# Altium PCB Multivibrator.PcbDoc
Units mm, origin at the board's own origin, x right, y up, seen from the top; angles counter-clockwise.
Board outline 75 x 75 mm, 2 copper layers (Top Layer, Bottom Layer); 9 components, 6 nets, 24 pads, 2 vias.
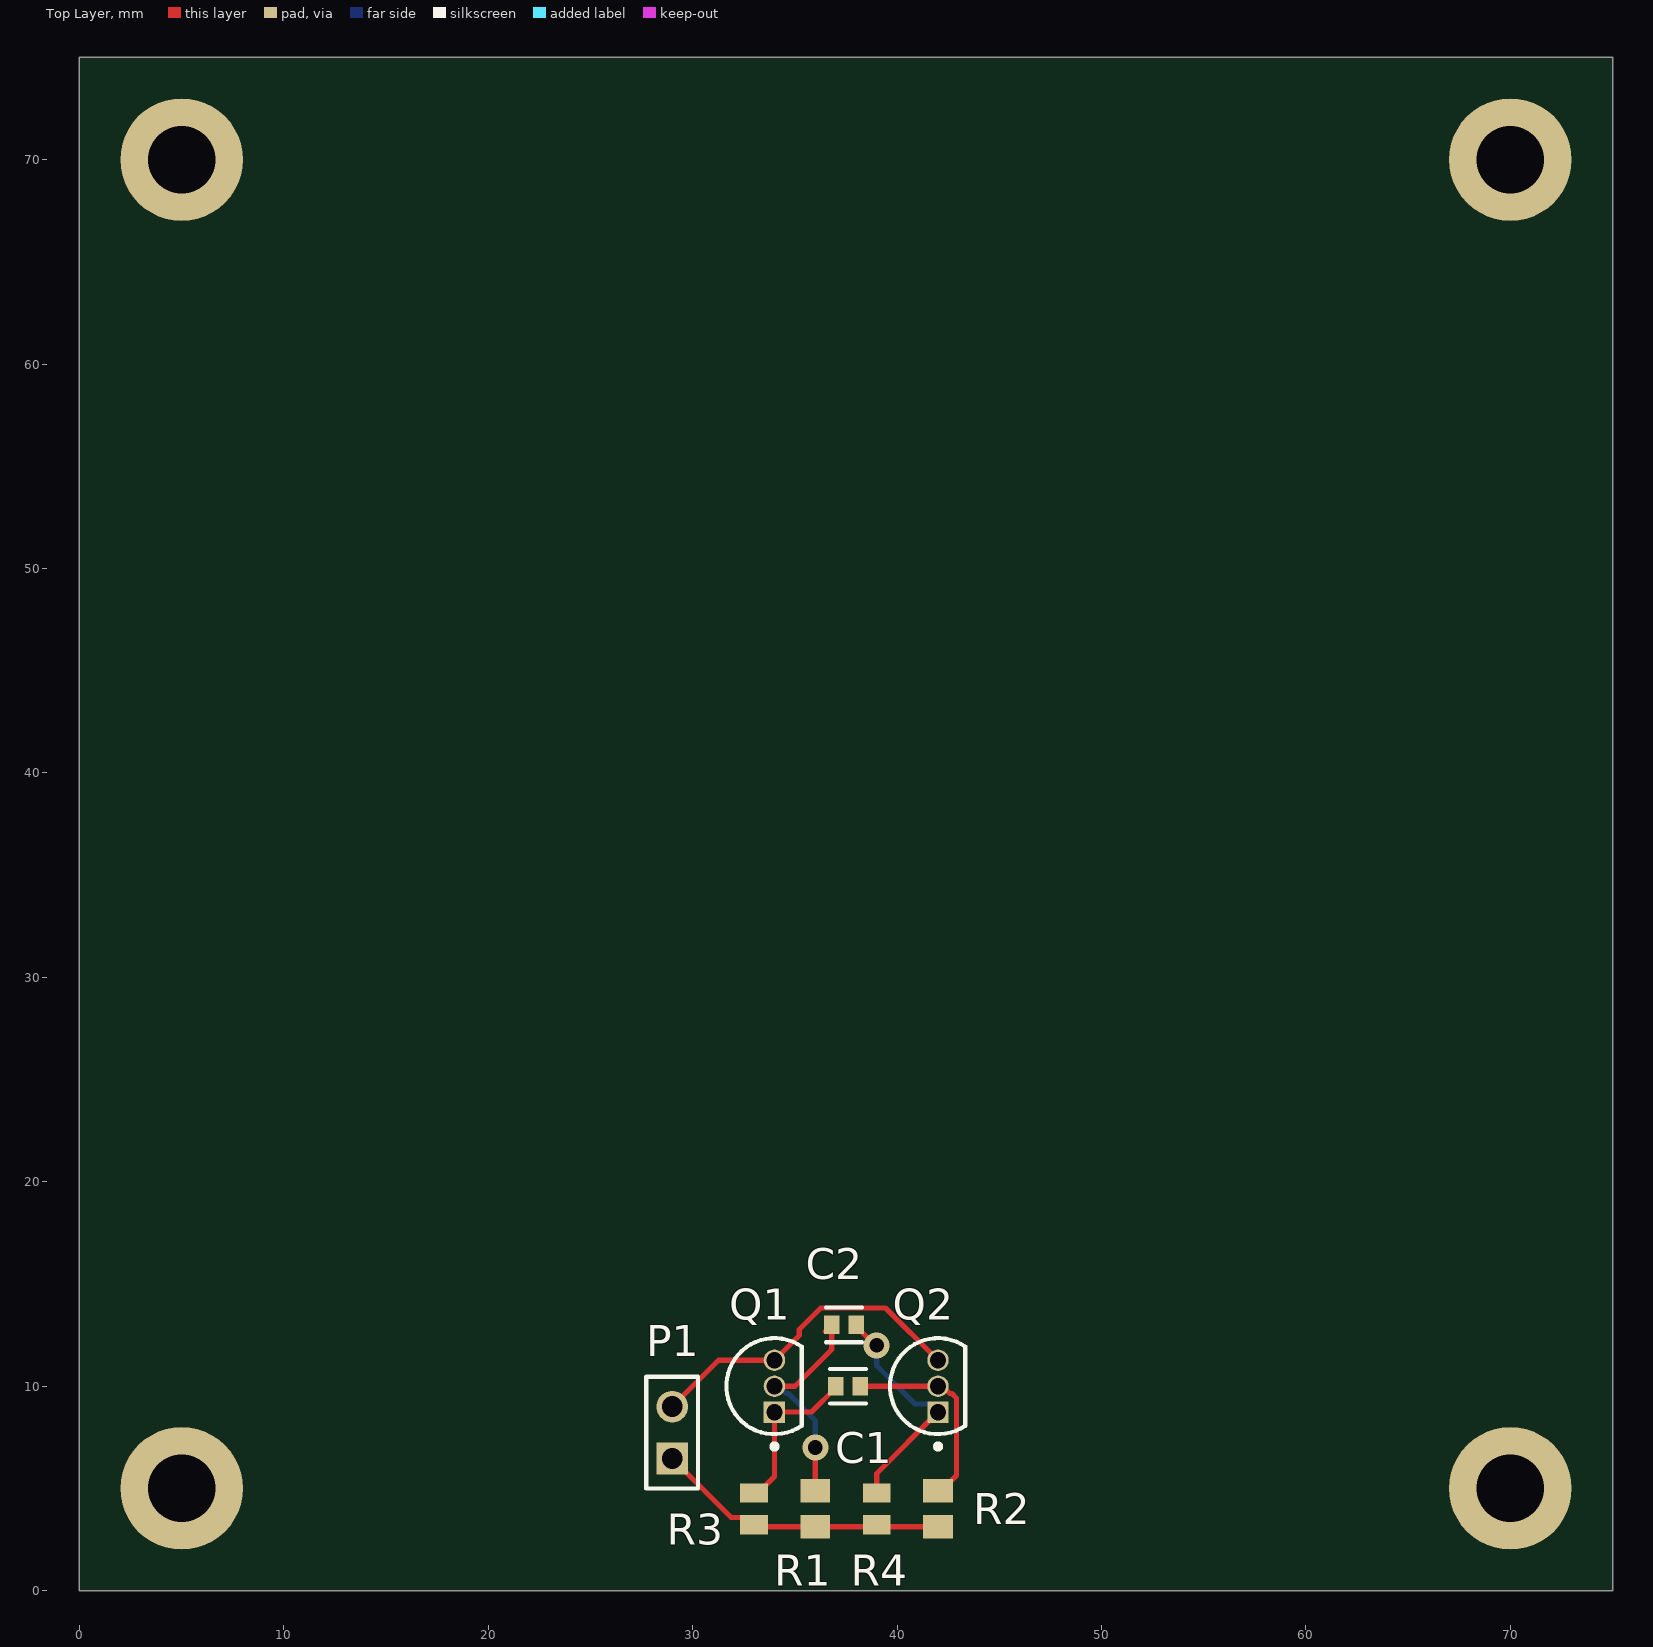
[diagram p0: Top Layer view]
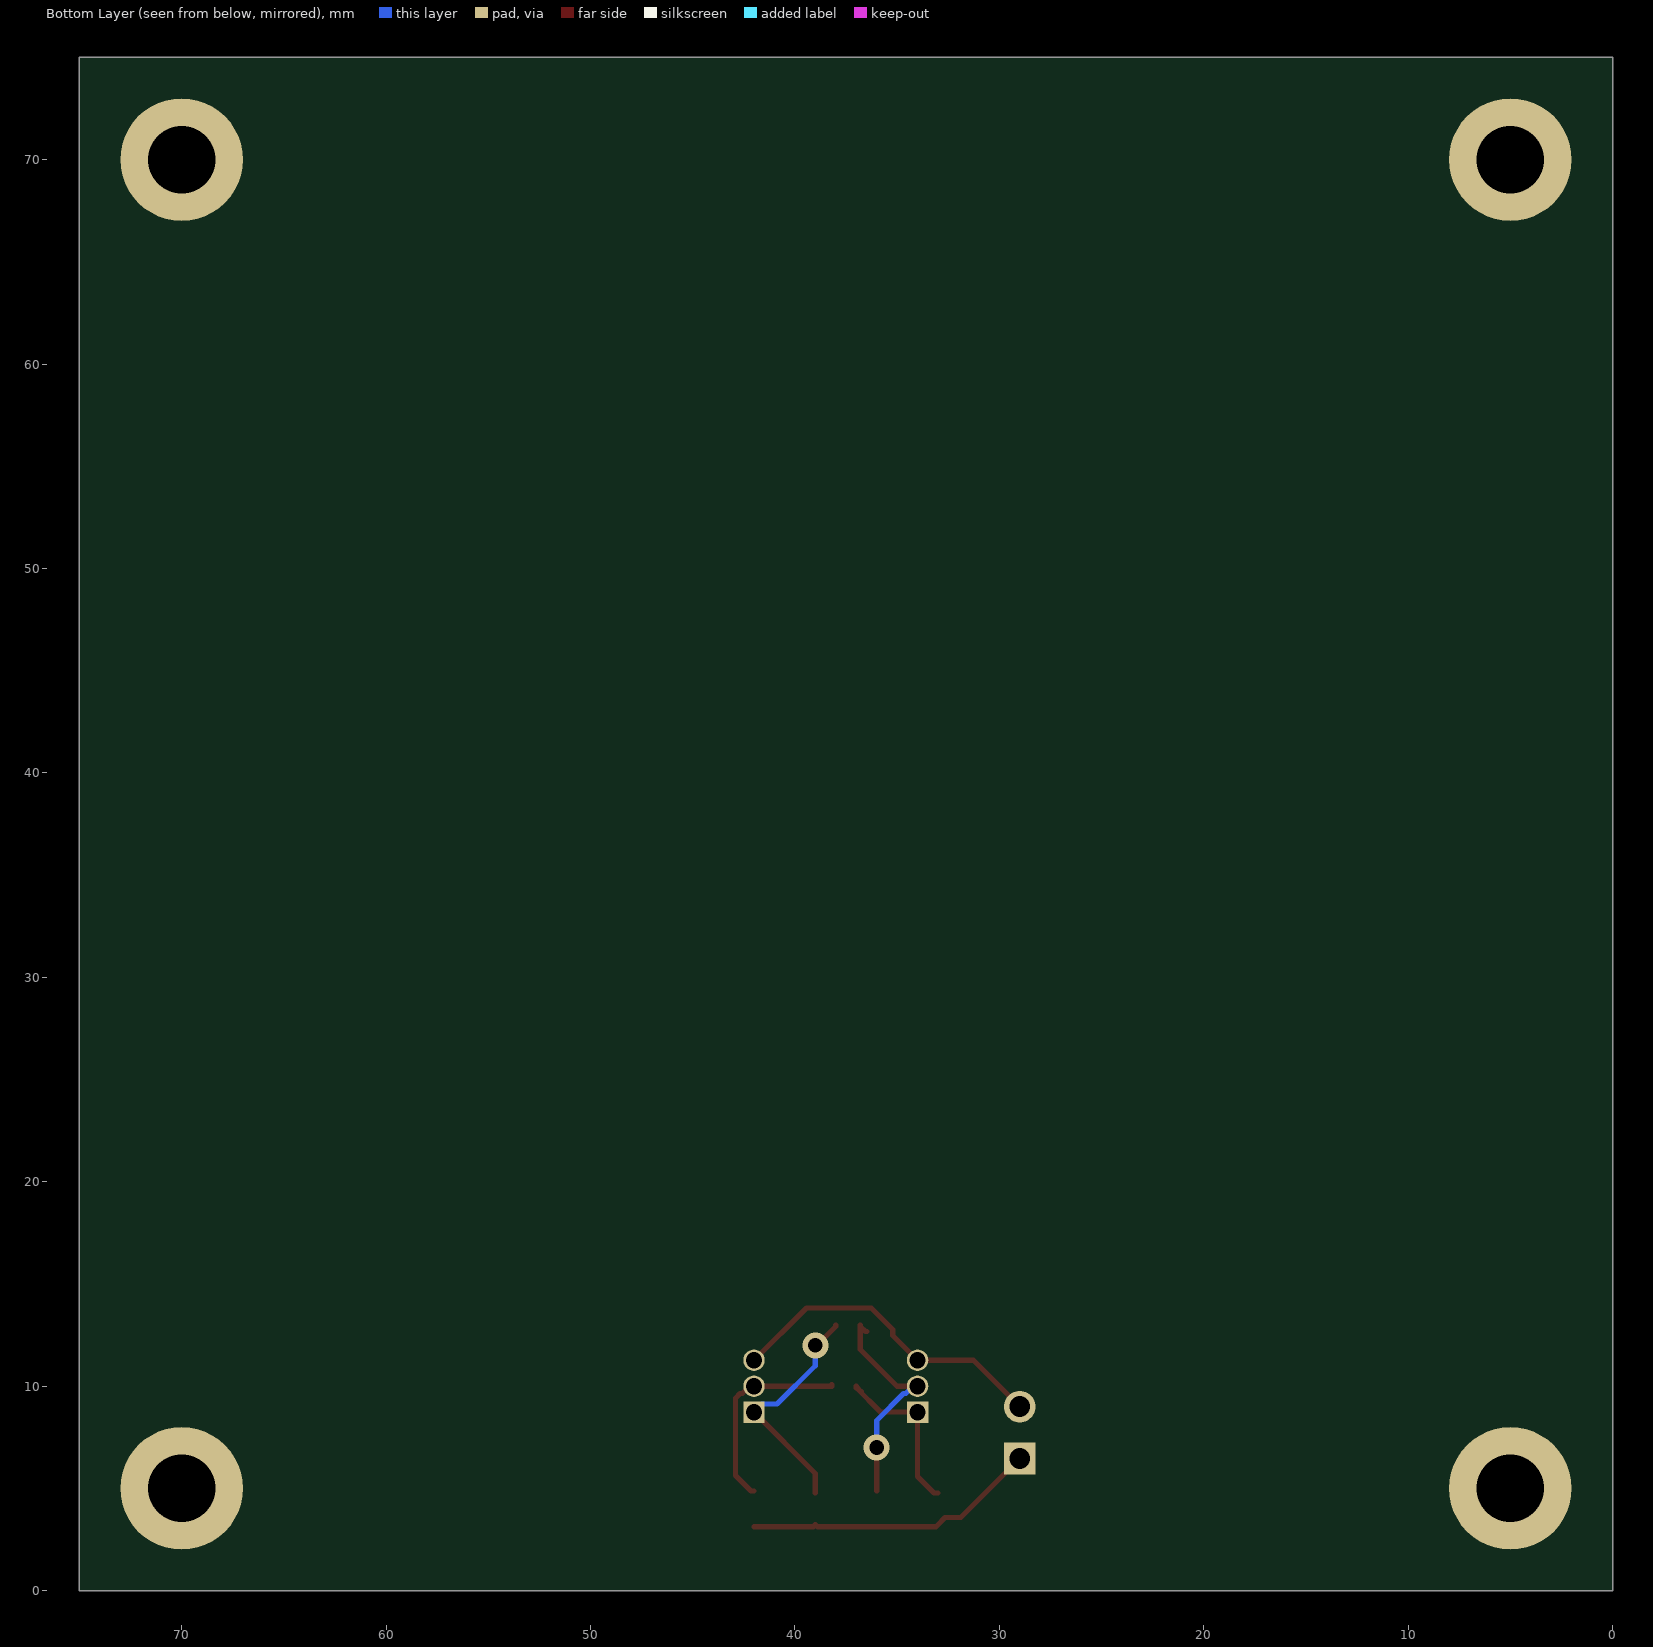
[diagram p1: Bottom Layer view, seen from below]

## Layer stack, top to bottom
Top Solder: solder mask 0.0102, Solder Resist, Dk 3.5
Top Layer: signal copper 0.0356
Dielectric 1: dielectric 0.32, FR-4, Dk 4.8
Bottom Layer: signal copper 0.0356
Bottom Solder: solder mask 0.0102, Solder Resist, Dk 3.5

## Board outline
0,0 0,75 75,75 75,0

## Design rules (kind name [scope] priority, off if disabled: settings)
Clearance [All] p1: gap=0.254 ignorepadtopadclearanceinfootprint=FALSE except(0.22: THPad-THPad)
HoleSize [All] p1: absolutevalues=TRUE maxlimit=3.3 minlimit=0.025 maxpercent=80.000 minpercent=20.000
MinimumSolderMaskSliver [All] p1: minsoldermaskwidth=0.22
PolygonConnect [All] p1: connectstyle=Relief reliefconductorwidth=0.254 reliefentries=4 polygonreliefangle="90 Angle" airgapwidth=0.254
RoutingVias [All] p1: holewidth=0.711 width=1.27 viastyle="Through Hole" minholewidth=0.71 minwidth=1.26 maxholewidth=0.712 maxwidth=1.28
SolderMaskExpansion SolderMaskExpansion_Transistor [HasFootprint('ONSC-TO-92-3-29-11')] p1: expansion=0 istentingtop=FALSE
SolderMaskExpansion [All] p2: expansion=0.102 istentingtop=FALSE
Width [All] p1: maxlimit=0.254 minlimit=0.254 preferedwidth=0.254
28 further rules are at their usual default settings.

## Components (designator, comment, footprint, x,y, rotation, side; value= is the part's Value field where it differs from the comment)
C1 "22nF" FP-C0603C-CF-MFG 37.6,10 r0 top value="22,000 pF"
C2 "22nF" FP-C0603C-CF-MFG 37.4,13 r0 top value="22,000 pF"
P1 "TSW-102-26-F-S" SMTC-TSW-102-26-XX-S 29,6.46 r90 top
Q1 "BC547CG" ONSC-TO-92-3-29-11 34,10 r90 top
Q2 "BC547CG" ONSC-TO-92-3-29-11 42,10 r90 top
R1 "100K" RESC2013X70X40NL20T20 36,4 r270 top
R2 "100K" RESC2013X70X40NL20T20 42,4 r270 top
R3 "1K" RESC2013X70X40LL20T20 33,4 r270 top
R4 "1K" RESC2013X70X40LL20T20 39,4 r270 top

## Footprints (in the part's own frame and the unit in brackets; to place one, negate y for a bottom-side part, rotate by r counter-clockwise, add the part's x,y. Pads: shape width x height; smd on the part's side, far side on the other; paste and mask are expansions set on the pad)
FP-C0603C-CF-MFG [mm]
  rect 0.75x0.9 smd paste+0 mask+0: 1(-0.6,0) 2(0.6,0)
  silkscreen extent -0.87,-0.85 0.88,0.85, body extent -1.2,-0.6 1.2,0.6, height 0.25
ONSC-TO-92-3-29-11 [mm] "TO, 3-Leads, Body Dia 4.7mm, Pitch 1.27mm"
  rect 1.05x1.05 hole 0.8: 1(-1.27,0)
  round 1.05 hole 0.8: 2(0,0) 3(1.27,0)
  silkscreen extent -3.07,-1.34 2.35,2.35, body extent -2.35,-1.33 2.36,2.36, height 7.87
RESC2013X70X40LL20T20 [mm] "Chip Resistor, 2-Leads, Body 2.00x1.25mm, IPC High Density"
  rect 0.95x1.35 smd: 1(-0.775,0) 2(0.775,0)
  body extent -1.1,-0.72 1.1,0.72, height 0.7
RESC2013X70X40NL20T20 [mm] "Chip Resistor, 2-Leads, Body 2.00x1.25mm, IPC Medium Density"
  rect 1.15x1.45 smd: 1(-0.875,0) 2(0.875,0)
  body extent -1.1,-0.72 1.1,0.72, height 0.7
SMTC-TSW-102-26-XX-S [mm] ".025 SQ Post Terminal Strip Assembly, 1x2 Pins, Vertical, 2.54mm Pitch, Male"
  rect 1.55x1.55 hole 1.02: 1(0,0)
  round 1.55 hole 1.02: 2(2.54,0)
  silkscreen extent -1.46,-1.27 4,1.27, body extent -1.4,-1.27 3.81,1.27, height 8.38

## Part data
C1 C2: library part CMP-2006-03745-2, "CAP CER 0.022UF 16V 5% X7R 0603", Capacitance="22,000 pF", Manufacturer=KEMET, Manufacturer Part Number=C0603C223J4RACTU, Package=C0603C-CF, Temperature="-55°C to +125°C", Temperature Characteristic=X7R, Temperature Coefficient=30ppm/°C, Temperature Range High=+125°C, Temperature Range Low=-55°C, Tolerance=0.05, Voltage Rating="16 V", Automotive=Yes, Automotive Grade="Grade 1", Category=Cap, ComponentLink2Description=Datasheet, ComponentLink2URL=https://api.kemet.com/component-edge/download/datasheet/C0603C100J5GACAUTO.pdf, Device Class L1="Passive Components", Device Class L2=Capacitors, Device Class L3="Ceramic Capacitors", Digikey Description="CAP CER 0.022UF 16V 5% X7R 0603", Height=0.87mm, Lead Free=Yes, Material=Ceramic, Mouser Description="Multilayer Ceramic Capacitors MLCC - SMD/SMT 16volts 22000pF X7R 5%", Octopart=https://octopart.com/c0603c223j4ractu-kemet-12542861, RoHS=TRUE
P1: library part CMP-1024-00329-1, "0.025\" SQ Post Header, Through-hole, Vertical, -55 to 125 degC, 2.54 mm Pitch, 2-Pin, Male, RoHS", Manufacturer=Samtec, Temperature Range="-55 to 125 degC", ComponentLink1Description="Manufacturer URL", ComponentLink1URL=http://www.samtec.com, ComponentLink2Description=Datasheet, ComponentLink2URL=http://www.samtec.com/documents/webfiles/pdf/TSW_TH.PDF, ComponentLink3Description="Package Specification", ComponentLink3URL=http://www.samtec.com/documents/webfiles/cpdf/TSW-XXX-XX-XXX-X-XX-XXX-MKT.pdf, DatasheetVersion=F-214, Mounting Technology=Through-hole, Orientation=Vertical, PackageDescription=".025[0.64] SQ. Post Terminal Strip Assembly", PackageReference=TSW-102-26-XX-S, PackageVersion="DM, 8/1988", PartNumber=TSW-102-26-F-S, Pitch="2.54 mm", RoHS=True
Q1 Q2: library part CMP-1048-01464-1, "Amplifier Transistor, NPN Silicon, 3-Pin TO-92, Pb-Free, Bulk Box", Manufacturer="On Semiconductor", ComponentLink1Description="Manufacturer URL", ComponentLink1URL=http://www.onsemi.com/, ComponentLink2Description=Datasheet, ComponentLink2URL=http://www.onsemi.com/pub_link/Collateral/BC546-D.PDF, ComponentLink3Description="Package Specification", ComponentLink3URL=http://www.onsemi.cn/pub_link/Collateral/2N6426-D.PDF, DatasheetVersion="Rev. 7", fT Min (MHz)=150, IC Continuous (A)=0.1, Mounting Technology="Through Hole", PackageDescription="3-Pin Transistor Outline, Body 4.825 x 3.685 mm, Pitch 1.27 mm", PackageReference=TO-92-3-29-11_AM_SL, PackageVersion="Rev. AM", Packing="Bulk Box", PartNumber=BC547CG, Polarity=NPN, RoHS=TRUE
R1 R2: library part CMP-2001-00338-1, Manufacturer=Panasonic, Part Number=ERJ-6GEYJ104V
R3 R4: library part CMP-2001-00477-1, Manufacturer=Panasonic, Part Number=ERJ-P06J102V

## Free pads (board coordinates)
  round 6 hole 3.3: 3(5,5) 3(5,70) 3(70,5) 3(70,70)

## Via types
v1: diameter 1.27, hole 0.711, Top Layer to Bottom Layer, tented both sides, 2 vias

## Nets (pads, with @x,y where several pads share a name; then routed paths per layer and width w, separated by ;. In a path a pad name is that pad's centre, name@x,y a point inside that pad or via, vN(x,y) a via of type N, cw(c..) or ccw(c..) an arc to the next point about the centre after c; other vN are vias at no path point)
12V: P1.1 R1.2 R2.2 R3.2 R4.2 | length 14.5
  Top Layer w0.254: P1.1 31.887,3.573 32.652,3.573 R3.2 33.1,3.125 R1.2 38.9,3.125 R4.2 39.1,3.125 R2.2
GND: P1.2 Q1.3 Q2.3 | length 16.2
  Top Layer w0.254: P1.2 31.27,11.27 Q1.3 35.21,12.48 35.21,12.774 36.267,13.831 39.439,13.831 Q2.3
NetC1_1: C1.1 Q1.1 R3.1 | length 8.4
  Top Layer w0.254: R3.1 33.2,4.775 34,5.575 Q1.1 35.805,8.73 37,9.925 C1.1@37,9.978 ; C1.1@36.752,9.73 C1.1@37,9.978 ; C1.1 C1.1@37,9.978
NetC1_2: C1.2 Q2.2 R2.1 | length 10
  Top Layer w0.254: C1.2@38.2,10.075 C1.2 Q2.2 42.215,10 42.579,9.636 42.683,9.636 42.906,9.413 42.906,5.631 42.15,4.875 R2.1
NetC2_1: C2.1 Q1.2 R1.1 | length 11.3
  Top Layer w0.254: Q1.2 35,10 36.8,11.8 C2.1@36.8,12.925 ; R1.1 v1(36,7) ; C2.1@36.477,12.677 36.552,12.677 C2.1@36.8,12.925 ; C2.1 C2.1@36.8,12.925
  Bottom Layer w0.254: Q1.2 34.215,10 34.579,9.636 34.683,9.636 36,8.319 v1(36,7)
NetC2_2: C2.2 Q2.1 R4.1 | length 11.6
  Top Layer w0.254: C2.2 38,12.925 38.925,12 v1(39,12) ; R4.1 39,5.73 Q2.1
  Bottom Layer w0.254: v1(39,12) 39,11 40.872,9.128 41.602,9.128 Q2.1

## Dimensions
75,0 to 75,75 on Mechanical 5
5,70 to 70,70 on Mechanical 5
75,0 to 0,0 on Mechanical 5